# Altium PCB XL4016_buck.PcbDoc
Units mm, origin at the board's own origin, x right, y up, seen from the top; angles counter-clockwise.
Board outline 67.31 x 58.17 mm, 2 copper layers (Top Layer, Bottom Layer); 28 components, 9 nets, 73 pads, 149 vias.
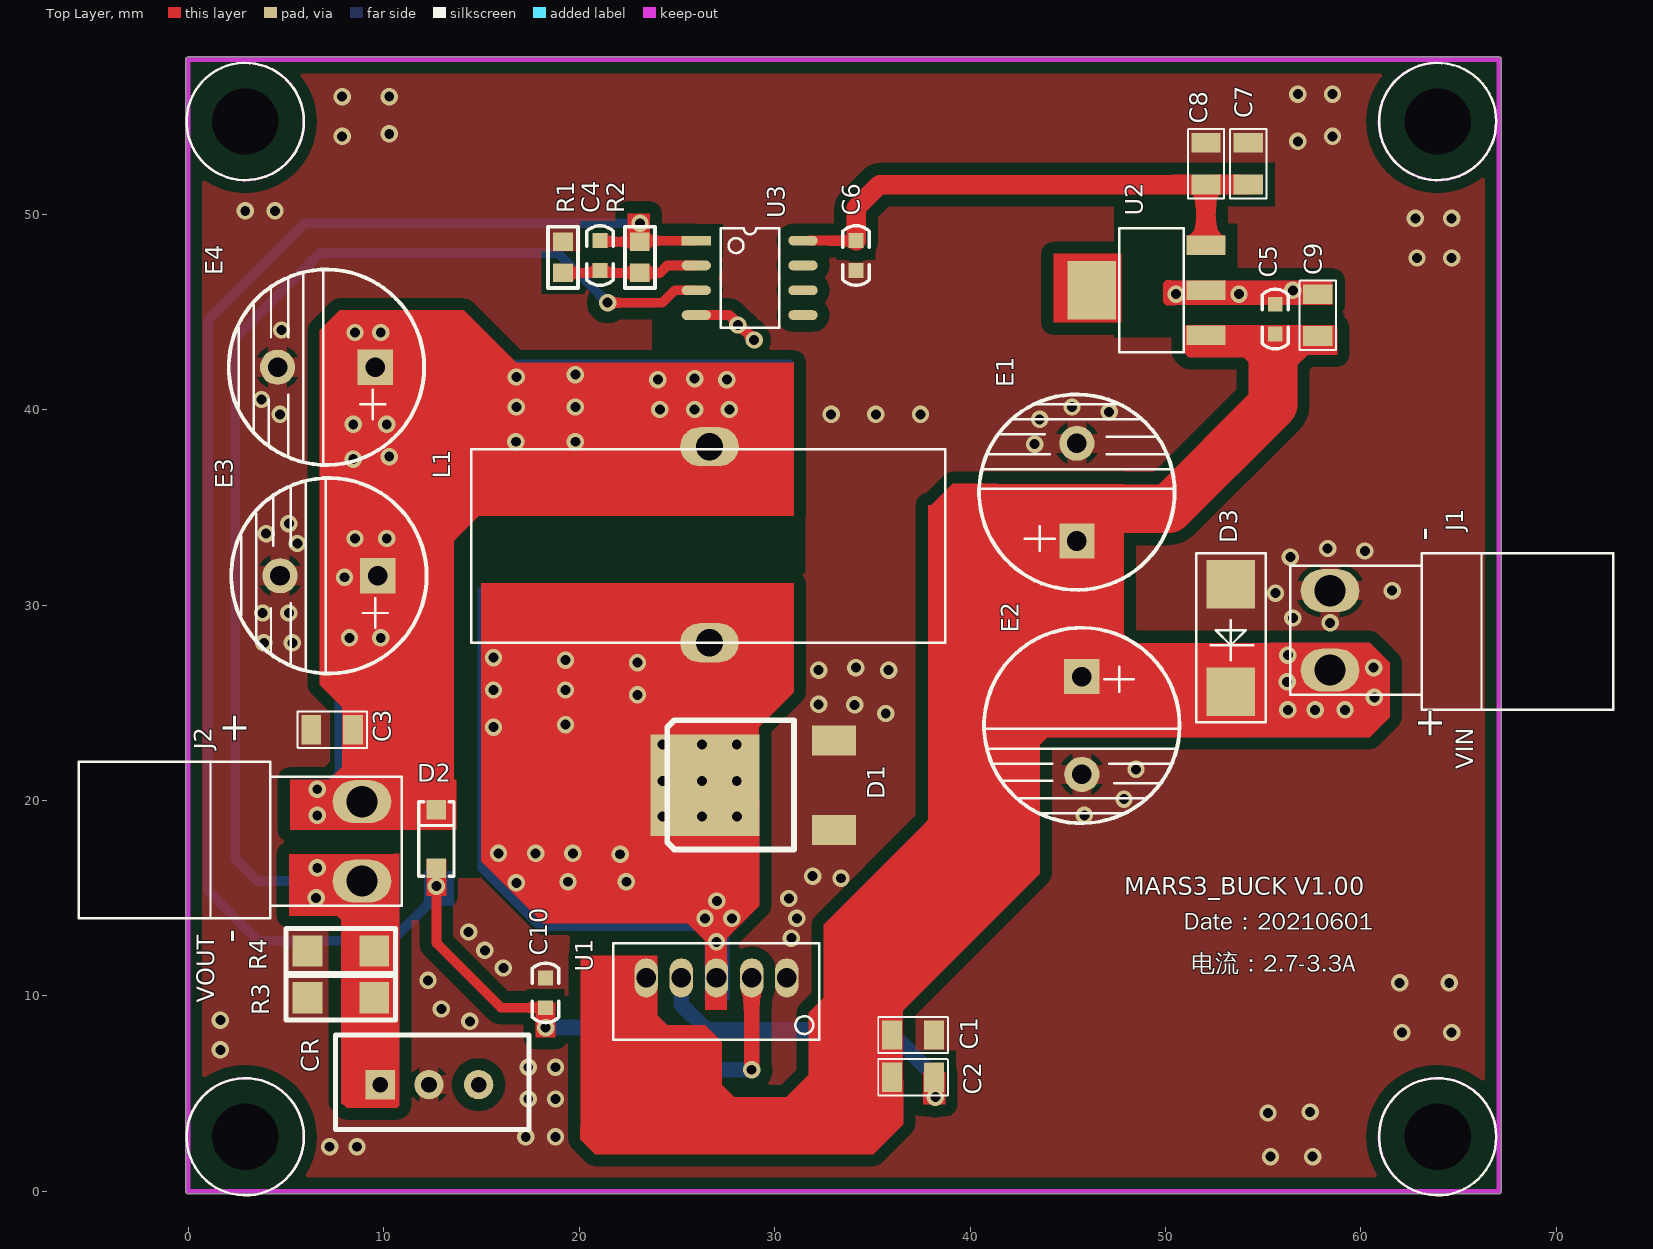
[diagram p0: Top Layer view]
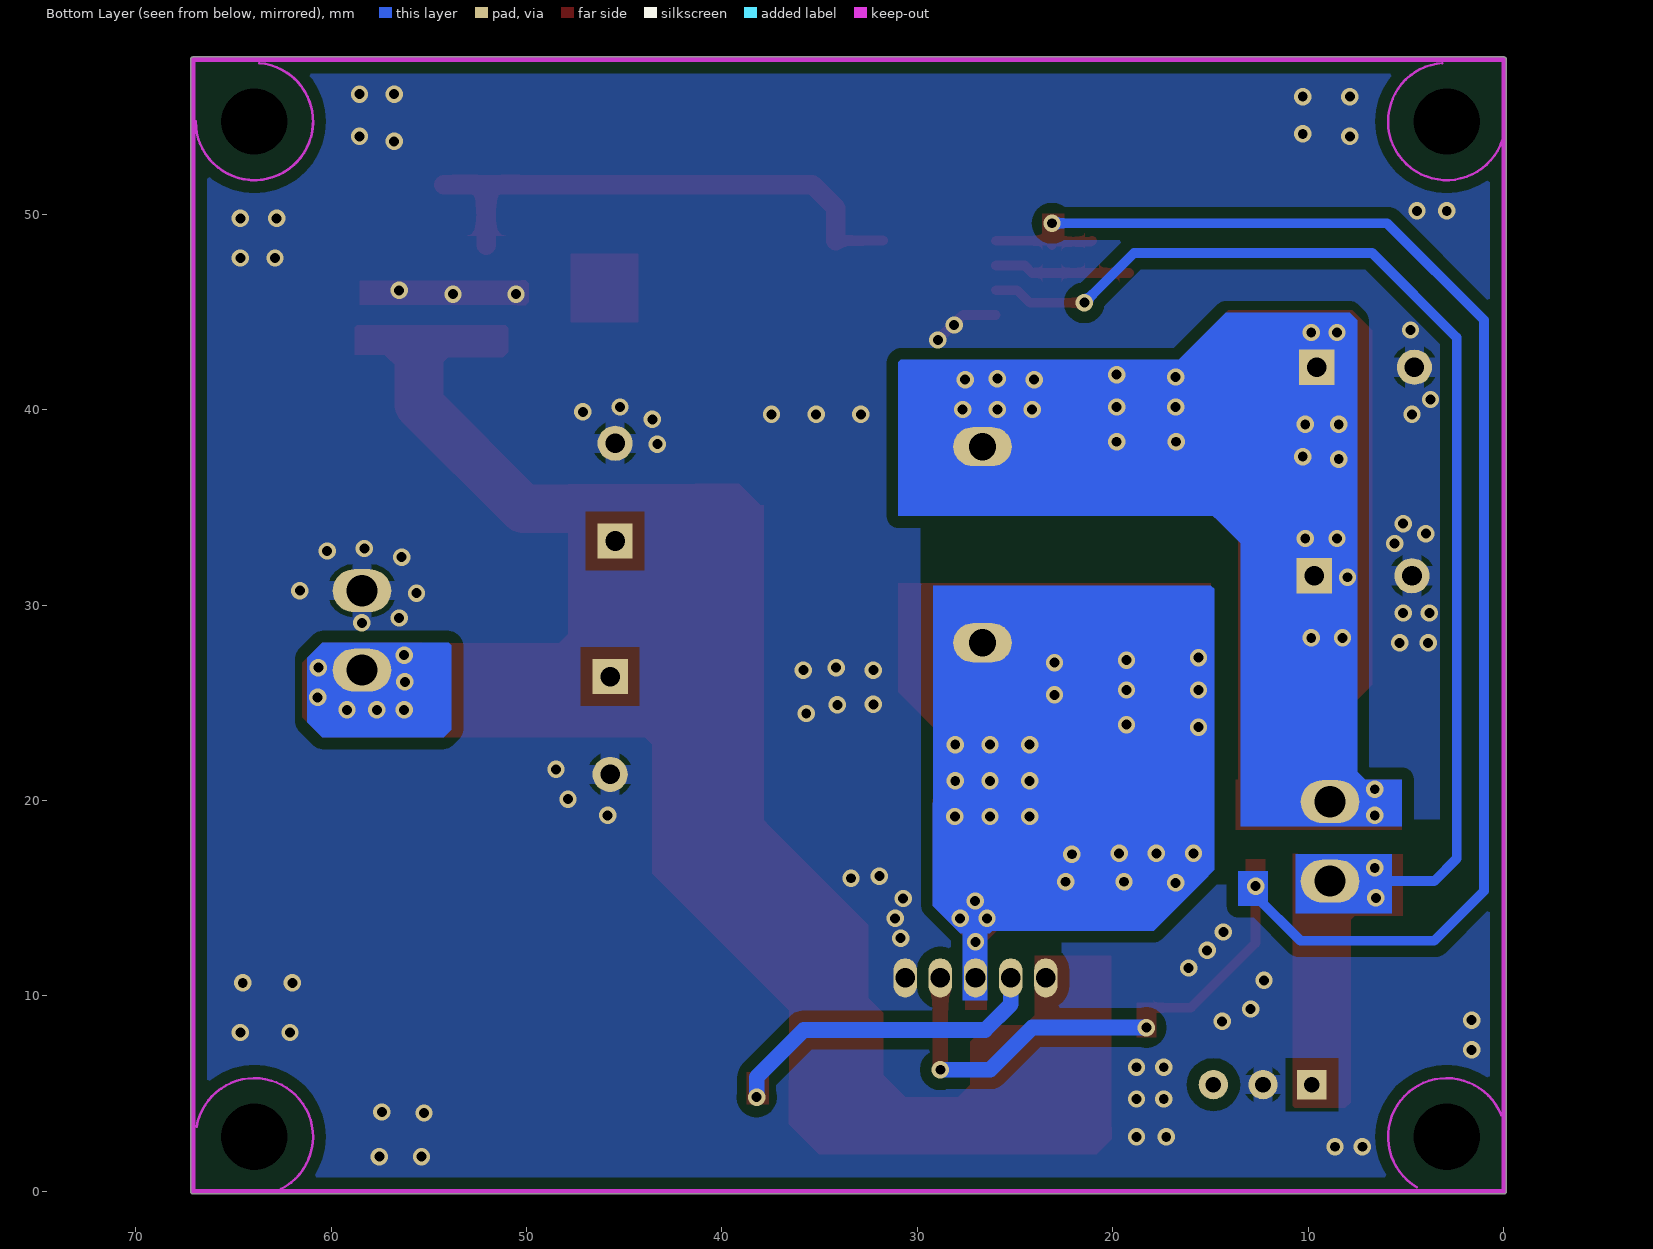
[diagram p1: Bottom Layer view, seen from below]

## Layer stack, top to bottom
Top Solder: solder mask 0.0102, Solder Resist, Dk 3.5
Top Layer: signal copper 0.0356
Dielectric 1: dielectric 0.32, FR-4, Dk 4.8
Bottom Layer: signal copper 0.0356
Bottom Solder: solder mask 0.0102, Solder Resist, Dk 3.5

## Board outline
-0.127,0 ccw(c0,0) 0,-0.127 67.056,-0.127 ccw(c67.056,0) 67.183,0 67.183,57.912 ccw(c67.056,57.912) 67.056,58.039 20.066,58.039 cw(c20.066,57.912) 20.066,58.039 0,58.039 ccw(c0,57.912) -0.127,57.912

## Design rules (kind name [scope] priority, off if disabled: settings)
Clearance Clearance_1 [InPolygon] p1: gap=0.6 ignorepadtopadclearanceinfootprint=FALSE
Clearance [All] p2: gap=0.5 ignorepadtopadclearanceinfootprint=FALSE
PolygonConnect PolygonConnect_1 [InComponentClass('chajian')] p1: thpad.connectstyle=Relief thpad.reliefconductorwidth=1 thpad.reliefentries=4 thpad.polygonreliefangle="90 Angle" thpad.airgapwidth=0.254 smdpad.connectstyle=Relief smdpad.reliefconductorwidth=0.254 smdpad.reliefentries=4 smdpad.polygonreliefangle="90 Angle" smdpad.airgapwidth=0.254 via.connectstyle=Relief via.reliefconductorwidth=0.254 via.reliefentries=4 via.polygonreliefangle="90 Angle" via.airgapwidth=0.254
PolygonConnect [All] p2: connectstyle=Direct reliefconductorwidth=0.254 reliefentries=4 polygonreliefangle="90 Angle" airgapwidth=0.254
RoutingVias [All] p1: holewidth=0.711 width=1.27 viastyle="Through Hole" minholewidth=0.711 minwidth=1.27 maxholewidth=0.711 maxwidth=1.27
SolderMaskExpansion [All] p1: expansion=0.102
Width [All] p1: maxlimit=10 minlimit=0.3 preferedwidth=0.3
30 further rules are at their usual default settings.

## Classes and differential pairs
component class chajian: CR E1 E2 E3 E4 J1

## Components (designator, comment, footprint, x,y, rotation, side; value= is the part's Value field where it differs from the comment)
C1 "1UF/50V" C0805 37.084,8.001 r180 top
C2 "1UF/50V" C0805 37.084,5.842 r180 top
C3 "1UF/50V" C0805 7.366,23.622 r0 top
C4 "33NF/50V" C0603 21.082,47.879 r270 top
C5 "0.1uF/25V" C0603 55.626,44.628 r270 top
C6 "0.1uF/50V" C0603 34.163,47.879 r90 top
C7 "2.2UF/50V" C0805 54.229,52.578 r270 top
C8 "2.2UF/50V" C0805 52.07,52.578 r270 top
C9 "2.2UF/50V" C0805 57.785,44.831 r270 top
C10 "0.1uF/50V" C0603 18.298,10.161 r270 top
CR "100R" 3296W 9.819,5.461 r0 top
D1 "Schottky" TO-2520 30.099,20.701 r90 top
D2 "BZT52C30 (WQ)" SOD123 12.7,18.034 r90 top
D3 "SMBJ28A" DO214AA 53.34,28.321 r270 top
E1 "680UF/35V" C10X17 45.466,33.274 r90 top
E2 "680UF/35V" C10X17 45.72,26.336 r270 top
E3 "330UF/35V" C10X17 9.699,31.496 r180 top
E4 "330UF/35V" C10X17 9.572,42.164 r180 top
J1 "VIN" VH3.96_2WP 63.119,24.638 r0 top
J2 "VOUT" VH3.96_2WP 4.191,21.971 r180 top
L1 "47uH" L24x10 38.735,37.973 r180 top
R1 "1K" 0603RES 19.177,47.79 r90 top
R2 "10K" 0603RES 23.114,47.79 r270 top
R3 "0.1R ±1%" R1206 7.81,9.906 r0 top
R4 "0.1R ±1%" R1206 7.81,12.299 r0 top
U1 "XL4016" TO220-5L 32.28,12.7 r180 top
U2 "LM2940-5V" SOT-223 50.927,42.926 r90 top
U3 "LM358" SOP8L 25.996,48.641 r0 top

## Footprints (in the part's own frame and the unit in brackets; to place one, negate y for a bottom-side part, rotate by r counter-clockwise, add the part's x,y. Pads: shape width x height; smd on the part's side, far side on the other; paste and mask are expansions set on the pad)
0603RES [mm]
  rect 0.95x1 smd: 1(-0.8,0) 2(0.8,0)
  silkscreen extent -1.56,-0.76 1.56,0.76
3296W [mm]
  rect 1.5x1.5 hole 0.8: 1(0,0)
  round 1.5 hole 0.8: 2(2.5,0) 3(5.04,0)
  silkscreen extent -2.29,-2.29 7.62,2.54
C10X17 [mm]
  rect 1.8x1.8 hole 1: 1(0,0)
  round 1.8 hole 1: 2(5,0)
  silkscreen extent -2.5,-5 7.5,5
C0603 [mil]
  rect 30x30 smd: 1(-29.96,-0.41) 2(30.04,-0.41)
  silkscreen extent -60,-27 60,26, body extent -50,-20 53,20, height 35
C0805 [mm]
  rect 1.016x1.5 smd: 1(-1.07,0) 2(1.07,0)
  silkscreen extent -1.78,-0.93 1.78,0.93, body extent -1,-0.62 1,0.63, height 1.25
DO214AA [mm]
  rect 2.5x2.5 smd: 1(-2.738,0) 2(2.762,0)
  silkscreen extent -4.32,-1.78 4.32,1.78
L24x10 [mm]
  oval 3x2 hole 1.4: 1(12.065,9.906) 2(12.065,-0.127)
  silkscreen extent 0,0 24.26,9.91
R1206 [mm]
  rect 1.52x1.6 smd: 1(-1.71,0) 2(1.71,0)
  silkscreen extent -2.79,-1.14 2.79,1.14, body extent -1.67,-0.87 1.68,0.86, height 1.61
SOD123 [mm]
  rect 1x1 smd: 1(-1.5,0) 2(1.5,0)
  silkscreen extent -1.91,-0.9 1.91,0.9, body extent -1.65,-0.79 1.7,0.76, height 1.6
SOP8L [mm]
  rect 1.5x0.5 smd: 1(0,0)
  oval 1.5x0.5 smd: 2(0,-1.27) 3(0,-2.54) 4(0,-3.81) 5(5.461,-3.81) 6(5.461,-2.54) 7(5.461,-1.27) 8(5.461,0)
  silkscreen extent 1.26,-4.44 4.23,0.64
SOT-223 [mm]
  rect 1x2 smd: 1(0.875,-1.143) 2(3.175,-1.143) 3(5.475,-1.143)
  rect 3x2.5 smd: ""(3.175,4.699)
  silkscreen extent 0,0 6.35,3.3
TO220-5L [mm]
  oval 1.2x2 hole 1: 1(1.651,1.778) 2(3.451,1.778) 3(5.251,1.778) 4(7.051,1.778) 5(8.851,1.778)
  silkscreen extent 0,0 10.54,4.95
TO-2520 [mil]
  rect 60x88 smd: 1(-87,-116) 3(93,-116)
  rect 205x220 smd: 2(3,144)
  silkscreen extent -126,-35 134,220, body extent -130,-137 130,245, height 91
VH3.96_2WP [mm]
  oval 3x2.2 hole 1.6: 1(-4.699,2.032) 2(-4.699,6.096)
  silkscreen extent -6.73,0 9.78,8

## Part data
C1 C2 C3 C7 C8 C9: library part CAP_5, "Capacitor"
C4 C5 C6 C10: library part CAP, "Capacitor"
CR: library part RV
D2: library part DIODE._1, "Diode"
D3: library part TVS
E1 E2 E3 E4: library part "CAPACITOR POL", "Capacitor"
J1 J2: library part VH3.96_2P
L1: library part INDUCTOR2
R1 R2: library part Res1_4, "Resistor", LatestRevisionDate=17-Jul-2002, LatestRevisionNote="Re-released for DXP Platform.", Published=8-Jun-2000, Publisher="Altium Limited"
R3 R4: library part RES

## Free pads (board coordinates)
  round 1.5 hole 3.4: ""(2.921,2.794) ""(2.921,54.737) ""(63.921,2.794) ""(63.921,54.737)

## Via types
v1: diameter 0.889, hole 0.508, Top Layer to Bottom Layer, tented both sides, 149 vias

## Nets (pads, with @x,y where several pads share a name; then routed paths per layer and width w, separated by ;. In a path a pad name is that pad's centre, name@x,y a point inside that pad or via, vN(x,y) a via of type N, cw(c..) or ccw(c..) an arc to the next point about the centre after c; other vN are vias at no path point)
5V: C6.2 C7.2 C8.2 U2.3 U3.8 | length 27.7
  Top Layer w0.5: U3.8@31.75,48.642 C6.2
  Top Layer w1: C6.2 34.173,50.302 35.379,51.508 C8.2 ; U2.3 C8.2 ; C7.2 C8.2
+24V: C1.2 C2.2 C5.2 C9.2 D3.2 E1.1 E2.1 J1.1 U1.5 U2.1 | length 32.8
  Top Layer w0.3: E1.1 45.974,33.274 47.625,34.925 ; E2.1@45.72,26.543 48.895,26.543 49.879,25.559 D3.2 ; C5.2 55.616,43.801 56.221,43.801 56.261,43.761 C9.2
  Top Layer w1: 42.418,26.035 45.419,26.035 E2.1 ; U2.1 C5.2@55.616,43.801
  Top Layer w2.5: 47.625,34.925 50.165,34.925 55.499,40.259 55.499,42.926
  other v1: 56.261,24.638 57.658,24.638 59.182,24.638 60.686,25.273 56.221,26.067 60.647,26.797 56.261,27.432
GND: C1.1 C3.1 C5.1 C6.1 C7.1 C8.1 C9.1 C10.1 CR.2 D1.1 D1.3 D3.1 E1.2 E2.2 E3.2 E4.2 J1.2 R1.2 R3.1 R4.1 U1.1 U2.2 U3.4 | length 10.3
  Top Layer w0.5: U3.4 27.686,44.831 v1(28.956,43.561) ; v1(50.537,45.901) U2.2@51.689,45.901
  Top Layer w1: U2.2 57.346,46.101 C9.1@57.594,45.853
  other v1: 55.372,1.778 57.531,1.778 7.239,2.286 8.636,2.286 17.272,2.794 18.796,2.794 55.245,4.012 57.404,4.064 17.399,4.726 18.796,4.726 17.399,6.35 18.796,6.35 1.651,7.239 62.103,8.128 64.643,8.128 14.414,8.7 1.651,8.763 12.954,9.335 61.976,10.668 64.516,10.668 12.267,10.795 16.129,11.43 15.176,12.334 30.861,12.954 14.351,13.271 31.138,13.97 30.734,14.986 33.401,16.022 31.947,16.129 45.847,19.24 47.879,20.066 48.491,21.59 35.687,24.447 34.099,24.892 32.258,24.921 32.258,26.67 35.839,26.67 34.163,26.797 3.876,28.067 5.334,28.067 58.42,29.083 56.515,29.337 3.81,29.591 5.154,29.591 55.626,30.607 61.595,30.734 56.388,32.448 60.198,32.766 58.293,32.893 5.588,33.147 3.99,33.655 5.154,34.163 43.307,38.227 43.561,39.497 4.699,39.751 32.893,39.751 35.179,39.751 37.465,39.751 47.117,39.878 45.22,40.132 3.749,40.513 4.774,44.069 28.125,44.323 53.764,45.901 56.515,46.101 62.865,47.752 64.643,47.752 62.785,49.784 64.643,49.784 2.921,50.165 4.445,50.165 56.769,53.721 7.874,53.975 58.547,53.975 10.287,54.102 7.874,56.007 10.287,56.007 56.769,56.134 58.547,56.134
NetC2_1: C2.1 U1.4 | length 16.9
  Bottom Layer w0.8: U1.4 25.229,9.569 26.543,8.255 35.814,8.255 38.227,5.842 v1(38.227,4.826)
NetC3_2: C3.2 D2.2 E3.1 E4.1 J2.1 L1.2 | length 26.4
  Top Layer w0.3: E3.1@8.89,31.496 E4.1@8.89,42.418
  Top Layer w0.5: E3.1@8.89,31.496 J2.1 12.422,19.939 D2.2@12.7,19.661
  other v1: 6.604,19.24 6.604,20.574 8.255,28.321 9.853,28.321 8.001,31.421 8.538,33.401 10.16,33.401 8.445,37.465 10.287,37.592 16.764,38.354 19.812,38.354 8.445,39.243 10.16,39.243 24.13,40.005 25.908,40.005 27.686,40.005 16.79,40.132 19.812,40.132 24.026,41.529 27.559,41.529 25.908,41.582 16.79,41.664 19.812,41.783 8.538,43.942 9.853,43.942
NetC4_1: C4.1 C10.2 D2.1 R2.1 U1.2 U3.1 | length 98.6
  Top Layer w0.5: v1(12.7,15.621) 12.7,12.7 16.002,9.398 C10.2 ; C4.1 21.122,48.59 R2.1 ; R2.1@23.114,48.425 23.33,48.641 U3.1
  Top Layer w0.8: v1(28.829,6.223) U1.2
  Bottom Layer w0.5: v1(12.7,15.621) 12.7,15.113 10.414,12.827 3.556,12.827 1.016,15.367 1.016,44.577 5.969,49.53 v1(23.114,49.53)
  Bottom Layer w0.8: v1(18.288,8.382) 24.13,8.382 26.289,6.223 v1(28.829,6.223)
NetC4_2: C4.2 R1.1 R2.2 U3.2 | length 7
  Top Layer w0.5: R1.1 R2.2 24.13,46.99 24.511,47.371 U3.2
NetCR_1: CR.1 J2.2 R3.2 R4.2 U3.3 | length 60.3
  Top Layer w0.5: v1(21.463,45.466) 24.257,45.466 24.892,46.101 U3.3
  Bottom Layer w0.5: J2.2 3.556,15.875 2.413,17.018 2.413,43.688 6.731,48.006 18.923,48.006 v1(21.463,45.466)
  other v1: 6.551,15.015 6.604,16.552
NetD1_2: D1.2 L1.1 U1.3 | length 17.2
  Top Layer w1: v1@26.441,13.741 D1.2 26.67,21.006 L1.1 ; U1.3 27.029,13.741
  other v1: 27.029,12.77 26.441,13.97 27.813,13.97 27.051,14.859 16.79,15.788 19.431,15.84 22.415,15.84 22.098,17.249 15.875,17.295 17.78,17.295 19.685,17.295 24.257,19.177 26.289,19.177 28.089,19.177 24.257,21.006 26.289,21.006 28.067,21.006 24.257,22.86 26.289,22.86 28.067,22.86 15.621,23.749 19.304,23.876 22.987,25.4 15.621,25.654 19.304,25.654 22.987,27.051 19.304,27.178 15.621,27.305
pads on no net: CR.3 U2. U3.5 U3.6 U3.7

## Polygon pours and split planes (outlines as drawn)
GND on Bottom Layer "Bottom Layer-GND" (solid, remove dead copper, pour order 2): -3.959,62.808 -3.959,-2.724 70.082,-2.724 70.082,61.157 68.304,62.935 -3.832,62.935
GND on Top Layer "Top Layer-GND" (solid, remove dead copper, pour order 4): -2.797,61.526 -2.797,-2.228 -2.924,-2.355 -2.797,-2.482 68.704,-2.482 68.704,59.621 66.799,61.526

## Keep-outs
Keep-Out Layer:
  lines w0.127: 0.075,53.788 ccw(c2.921,54.737) 3.143,57.729 ; 0.136,3.908 cw(c2.921,2.794) 4.447,0.211 ; 62.395,57.32 ccw(c63.921,54.737) 66.706,53.623 ; 62.817,0.005 cw(c63.921,2.794) 66.876,3.312 ; 63.665,57.726 ccw(c63.921,54.737) 66.921,54.737
  lines w0.254: 20.066,57.912 67.056,57.912 67.056,0 0,0 0,57.912 20.447,57.912

## Other copper
Top Layer:
  rectangle net +24V: 51.198,42.799 58.674,44.196
  rectangle net NetCR_1: 7.81,4.572 10.795,14.859
  rectangle: 44.259,44.45 47.752,47.977
  rectangle net GND: 50.038,45.339 52.479,46.609
  rectangle net GND: 50.927,45.339 58.547,46.609
  rectangle net +24V: 46.291,25.654 56.642,28.067
  rectangle net +24V: 22.606,3.937 26.441,8.509
  rectangle net NetC4_1: 17.78,7.874 18.796,9.652
  rectangle net NetC3_2: 9.652,19.812 13.589,37.211
  rectangle net NetCR_1: 5.154,14.097 10.795,17.272
  rectangle net NetD1_2: 26.441,9.271 27.559,13.208
  rectangle net +24V: 37.846,17.653 43.053,35.115
  rectangle net NetC2_1: 37.592,4.445 38.735,6.096
  rectangle net +24V: 32.512,5.08 36.576,13.335
  rectangle net +24V: 20.066,2.731 24.003,12.065
  rectangle net +24V: 40.322,24.257 47.879,36.195
  rectangle net +24V: 42.545,23.241 46.609,26.416
  rectangle net NetD1_2: 14.986,25.781 30.988,31.115
  rectangle net NetC3_2: 7.747,37.465 12.065,45.085
  rectangle net NetC3_2: 8.436,20.701 10.795,35.306
  rectangle net NetC3_2: 5.207,18.491 13.716,21.082
  rectangle net NetC4_1: 22.479,48.641 23.622,50.038
  rectangle net NetC3_2: 8.128,19.177 10.033,32.512
  rectangle net NetC3_2: 7.493,18.923 13.335,21.006
  rectangle net NetD1_2: 14.986,18.034 29.21,31.059
  rectangle net NetC4_1: 12.192,15.113 13.208,17.018
  rectangle net NetC3_2: 9.144,34.544 30.988,42.418
  rectangle net NetC3_2: 7.747,30.353 10.033,43.561
  rectangle net +24V: 53.467,43.053 58.674,44.323
  rectangle net +24V: 43.815,23.876 47.625,34.925
  rectangle net +24V: 44.323,23.876 55.245,27.305
  region net GND: 50.038,46.609 49.892,46.463 49.892,45.485 50.038,45.339 50.502,45.339 50.502,46.399 50.292,46.609
  region net GND: 50.038,46.609
  region net +24V: 58.674,42.799 58.781,42.799 58.781,44.216 58.674,44.323 58.547,44.323 58.547,44.144 58.42,44.017
  region net +24V: 58.547,44.323
  region net +24V: 58.674,44.323
  region net +24V: 51.07,44.323 50.935,44.188 50.935,42.928 51.19,42.672 51.219,42.701 52.451,42.701 52.451,43.18 52.578,43.307
  region net +24V: 56.515,42.06 57.346,42.892 57.346,43.598 56.679,43.598 56.261,43.18 56.261,42.291
  region net +24V: 56.515,42.545
  region net +24V: 53.467,44.323 51.07,44.323 51.063,42.799 51.19,42.672 53.995,42.672 54.249,42.418 54.483,42.418 54.483,42.856 54.61,42.983
  pour cut-out: 49.149,44.869 49.149,43.688 50.546,43.688 50.546,44.78 50.635,44.869
  region net NetCR_1: 7.81,4.572 8.101,4.282 10.693,4.282 10.795,4.384 10.795,4.572 10.219,4.572 9.52,5.271
  region net NetCR_1: 7.239,14.351 7.362,14.351 8.001,13.712 8.001,5.016 8.445,4.572 10.795,4.572 10.795,17.272 10.541,17.272 10.541,16.935 9.925,16.319
  region net NetCR_1: 7.239,14.605 9.144,12.7 9.398,12.7 9.398,14.605 9.525,14.732 9.398,14.859 7.366,14.859
  region net NetCR_1: 5.154,9.144
  pour cut-out: 11.557,17.335 13.421,17.335 13.589,17.168 13.589,16.022 14.879,16.022 14.986,16.129 14.717,16.398 14.717,18.303 14.478,18.542 14.427,18.491 11.791,18.491 11.557,18.257
  pour cut-out: 47.371,43.688 49.642,43.688 49.715,43.761 49.715,47.152 49.934,47.371 50.546,47.371 50.546,49.125 51.323,49.902 51.323,50.486 50.803,51.006 50.724,50.927 47.371,50.927
  pour cut-out: 23.749,44.86 23.749,42.926 28.141,42.926 28.292,42.775 28.292,43.688 27.051,43.688 26.13,44.609 25.168,44.609 25.168,45.238 25.146,45.26 24.826,44.939 23.876,44.939
  pour cut-out: 10.749,18.206 11.049,17.906 11.049,13.887 11.78,13.887 11.874,13.792 12.192,14.11 12.192,17.273 11.407,18.059
  pour cut-out: 19.558,13.532 19.558,12.169 19.454,12.065 25.116,12.065 25.527,12.476 25.527,12.192 25.941,12.192 26.068,12.319 26.068,12.954 25.806,12.954 25.298,13.462 19.685,13.462 19.685,12.483 19.501,12.299
  region net +24V: 46.99,28.829 47.561,28.829 50.038,26.352 49.466,25.781 47.879,25.781 46.101,27.559
  region net +24V: 36.068,8.763 43.561,16.256 43.561,24.066 42.926,24.066 32.512,13.652 32.512,9.144 33.02,8.636 37.465,13.081 37.465,13.97
  region: 36.449,9.335
  region: 48.133,17.272
  region: 42.672,19.304
  region: 59.944,44.323
  region net +24V: 26.737,6.029 28.448,4.318 28.194,4.064 28.194,3.175 26.416,3.175 25.4,4.191
  region net +24V: 26.441,8.509 27.305,7.645 27.305,4.318 25.527,4.318 25.273,4.064 24.765,4.572 24.765,6.223
  region net +24V: 23.622,9.398 24.511,8.509 26.441,8.509 26.441,7.074 26.035,6.667 25.59,7.112 22.733,7.112 22.733,9.017 22.479,9.271
  region net +24V: 20.066,3.302 20.066,2.667 20.828,1.905 21.844,1.905 22.987,3.048 22.352,3.683 21.727,3.683 21.685,3.725
  region net +24V: 31.75,8.255 31.75,9.144 34.099,11.493 34.099,6.223 33.211,6.223 32.957,6.477
  region net +24V: 23.622,5.842 24.638,4.826 30.607,4.826 31.75,5.969 31.75,8.255 34.036,8.255 36.576,5.715 36.576,3.429 35.052,1.905 21.781,1.905 20.955,2.731 20.955,4.719
  pour cut-out: 15.367,34.29 14.986,34.29 13.97,33.274 13.97,31.349 31.222,31.349 31.559,31.686 31.559,34.304 31.553,34.31 15.196,34.31 14.16,33.274
  pour cut-out: 13.8,20.744 13.97,20.574 14.351,20.955 14.732,20.955 14.732,31.66 14.752,31.68 14.682,31.75 13.8,31.75
  region net NetC3_2: 11.303,45.085 14.097,45.085 17.844,41.339 17.272,40.767 11.861,40.767 10.795,41.833 10.795,42.926
  region: 11.303,44.323
  region net NetC3_2: 12.7,32.385 16.129,35.814 16.129,36.83 12.065,36.83 11.811,37.084
  region net +24V: 37.973,35.052 39.116,36.195 41.404,36.195 41.404,34.163 41.023,34.544 38.354,34.544 38.354,34.671
  region net NetD1_2: 28.125,22.664 30.988,25.527 30.988,27.178 25.19,27.178
  region net NetD1_2: 14.986,18.796 14.986,16.891 18.161,13.716 25.781,13.716 25.781,18.923 26.162,19.304 25.273,20.193 21.336,20.193
  region: 18.288,19.367
  region net NetD1_2: 24.447,19.177 24.511,19.113 24.511,14.757 26.441,12.827 26.441,11.176 27.559,11.176 27.559,12.954 29.21,14.605 29.21,20.066 28.702,20.574
  region: 19.304,19.661
  region net +24V: 32.702,13.271 40.577,21.146 41.148,20.574 41.148,16.573 38.862,16.573 34.798,12.509 34.163,12.509 32.957,12.509
  region net +24V: 34.435,7.511 43.053,16.129 43.053,19.177 40.513,19.177 37.846,16.51 37.846,14.605
  region net +24V: 42.485,17.72 35.56,10.795 35.56,10.16 34.925,10.16 34.036,11.049 34.036,13.081 40.322,19.367 40.322,26.162
  region: 36.195,9.525
  region net +24V: 31.75,7.366 34.798,10.414 35.052,10.16 35.052,5.969 33.147,5.969
  region: 30.988,7.239
  region net +24V: 20.955,6.731 20.955,5.461 21.336,5.08 22.352,5.08 22.352,6.54 22.479,6.667 22.415,6.731
  region: 20.955,6.35
  region net +24V: 41.021,20.32 43.942,23.241 43.942,25.273 42.164,25.273 40.64,23.749 40.64,21.336
  region net +24V: 43.815,25.654 43.815,23.241 60.452,23.241 61.277,24.066 61.277,24.765 44.704,24.765
  region net NetC3_2: 7.747,45.085 6.731,44.069 6.731,25.908 7.747,24.892 8.382,25.527 9.779,25.527 9.779,29.972 9.144,30.607
  region net NetC3_2: 10.033,23.368 10.033,22.352 12.267,20.118 11.454,19.304 10.279,19.304 10.279,21.518 9.572,22.225
  region net NetC3_2: 10.414,32.258 13.335,35.179 13.335,37.592 9.525,37.592 9.144,37.973 8.89,37.719 8.89,32.512
  region net NetC3_2: 7.747,38.504 7.747,24.892 7.874,24.765 7.874,21.717 6.858,20.701 6.858,20.32 10.279,20.32
  region net +24V: 46.99,28.829 49.53,26.289 49.53,24.765 47.117,24.765 46.101,25.781 46.101,28.067
  region net +24V: 54.61,27.305 55.372,28.067 60.452,28.067 61.468,27.051 61.468,24.257 61.087,23.876 44.323,23.876 44.323,26.67
Bottom Layer:
  rectangle net NetC3_2: 7.493,19.939 13.462,43.815
  rectangle net NetD1_2: 15.113,17.907 29.21,30.988
  rectangle net NetC3_2: 8.763,34.544 30.988,42.418
  rectangle net NetD1_2: 17.907,13.335 27.94,19.177
  rectangle net +24V: 53.848,23.749 60.579,27.94
  rectangle net NetC3_2: 5.207,18.669 13.462,21.082
  rectangle net NetCR_1: 5.715,14.224 10.668,17.272
  rectangle net NetD1_2: 26.416,9.779 27.686,13.716
  rectangle net NetC4_1: 12.065,14.605 13.589,16.383
  pour cut-out: 22.606,13.208 22.606,11.927 25.328,11.927 25.974,12.573 26.035,12.573 26.035,12.85 25.677,13.208
  region net NetC3_2: 6.604,20.574 7.874,21.844 8.382,21.844 8.382,21.336 8.509,21.209 7.874,20.574
  region net NetD1_2: 15.367,30.988 14.986,30.988 14.822,30.824 14.822,16.452 15.526,15.748 15.566,15.788 18.015,15.788 18.015,20.428 18.161,20.574
  region: 15.113,30.988
  pour cut-out: 13.702,17.817 13.702,15.696 14.784,15.696 14.64,15.84 14.64,18.253 14.478,18.415 14.363,18.3 13.22,18.3
  pour cut-out: 13.696,19.304 13.462,19.07 13.462,18.057 13.22,18.3 13.22,16.859 14.184,15.895 14.548,15.895 14.548,17.469 14.732,17.653 14.732,30.914 14.912,30.914 15.113,31.115 29.845,31.115 29.845,34.111 24.892,34.111 24.84,34.163 14.911,34.163 13.716,32.968 13.716,18.796 13.22,18.3 13.843,17.676 13.843,16.129 14.314,16.129 14.548,15.895
  region net NetC3_2: 12.192,32.639 12.954,32.639 16.573,36.258 14.478,38.354 13.335,38.354 10.033,35.052
  region net NetC3_2: 7.493,43.815 7.493,44.577 7.874,44.958 14.224,44.958 16.637,42.545 30.861,42.545 30.988,42.418 30.988,40.767 12.7,40.767 12.192,41.275 12.446,41.529 12.446,43.053
  region net NetD1_2: 29.21,19.893 29.21,14.605 27.813,13.208 26.289,13.208 24.037,15.46
  region net NetD1_2: 15.113,17.907 15.113,16.129 17.907,13.335 20.447,13.335 20.447,18.923 20.193,19.177 19.558,18.542 15.24,18.542 15.24,18.034
  region net +24V: 61.214,27.305 61.214,24.003 60.452,23.241 54.229,23.241 53.848,23.622 53.848,27.94 53.975,28.067 60.452,28.067
  pour cut-out: 2.921,19.05 4.953,19.05 5.461,18.542 12.977,18.542 13.462,18.057 13.462,16.693 11.811,16.693 11.632,16.514 11.632,15.061 11.303,14.732 11.02,15.015 11.02,16.637 10.715,16.637 9.699,17.653 9.572,17.526 5.707,17.526 5.707,17.063 5.154,16.51 3.552,16.51 3.552,16.594 2.794,17.351 2.794,18.923
  region: 49.022,38.481

## Silkscreen, mask and mechanical layers (free items; w line width, h text height)
Top Overlay:
  circle w0.127: c63.921,54.737 r3
  circle w0.127: c63.921,2.794 r3
  circle w0.127: c2.921,2.794 r3
  circle w0.127: c2.921,54.737 r3
  text "-" at 64.342,33.274 h2.54 r90
  text "+" at 64.643,23.114 h2.54 r90
  text "+" at 3.476,22.86 h2.54 r90
  text "MARS3_BUCK V1.00" at 47.879,14.859 h1.52
  text "Date：20210601" at 50.927,13.081 h1.52
  text "-" at 3.302,12.7 h2.54 r90
  text "电流：2.7-3.3A" at 51.308,10.922 h1.52
Top Solder:
  lines w1: 27.051,12.792 27.051,14.859
Bottom Solder:
  rectangle: 23.622,18.034 29.21,23.368